# Altium PCB Schema_MaletteDevasion_PCB ASCII REV 1.00.PcbDoc
Units mm, origin at the board's own origin, x right, y up, seen from the top; angles counter-clockwise.
Board outline 390 x 250 mm, 2 copper layers (Top, Bottom), stack 1.54 mm thick; 86 components, 46 nets, 361 pads, 11 vias.
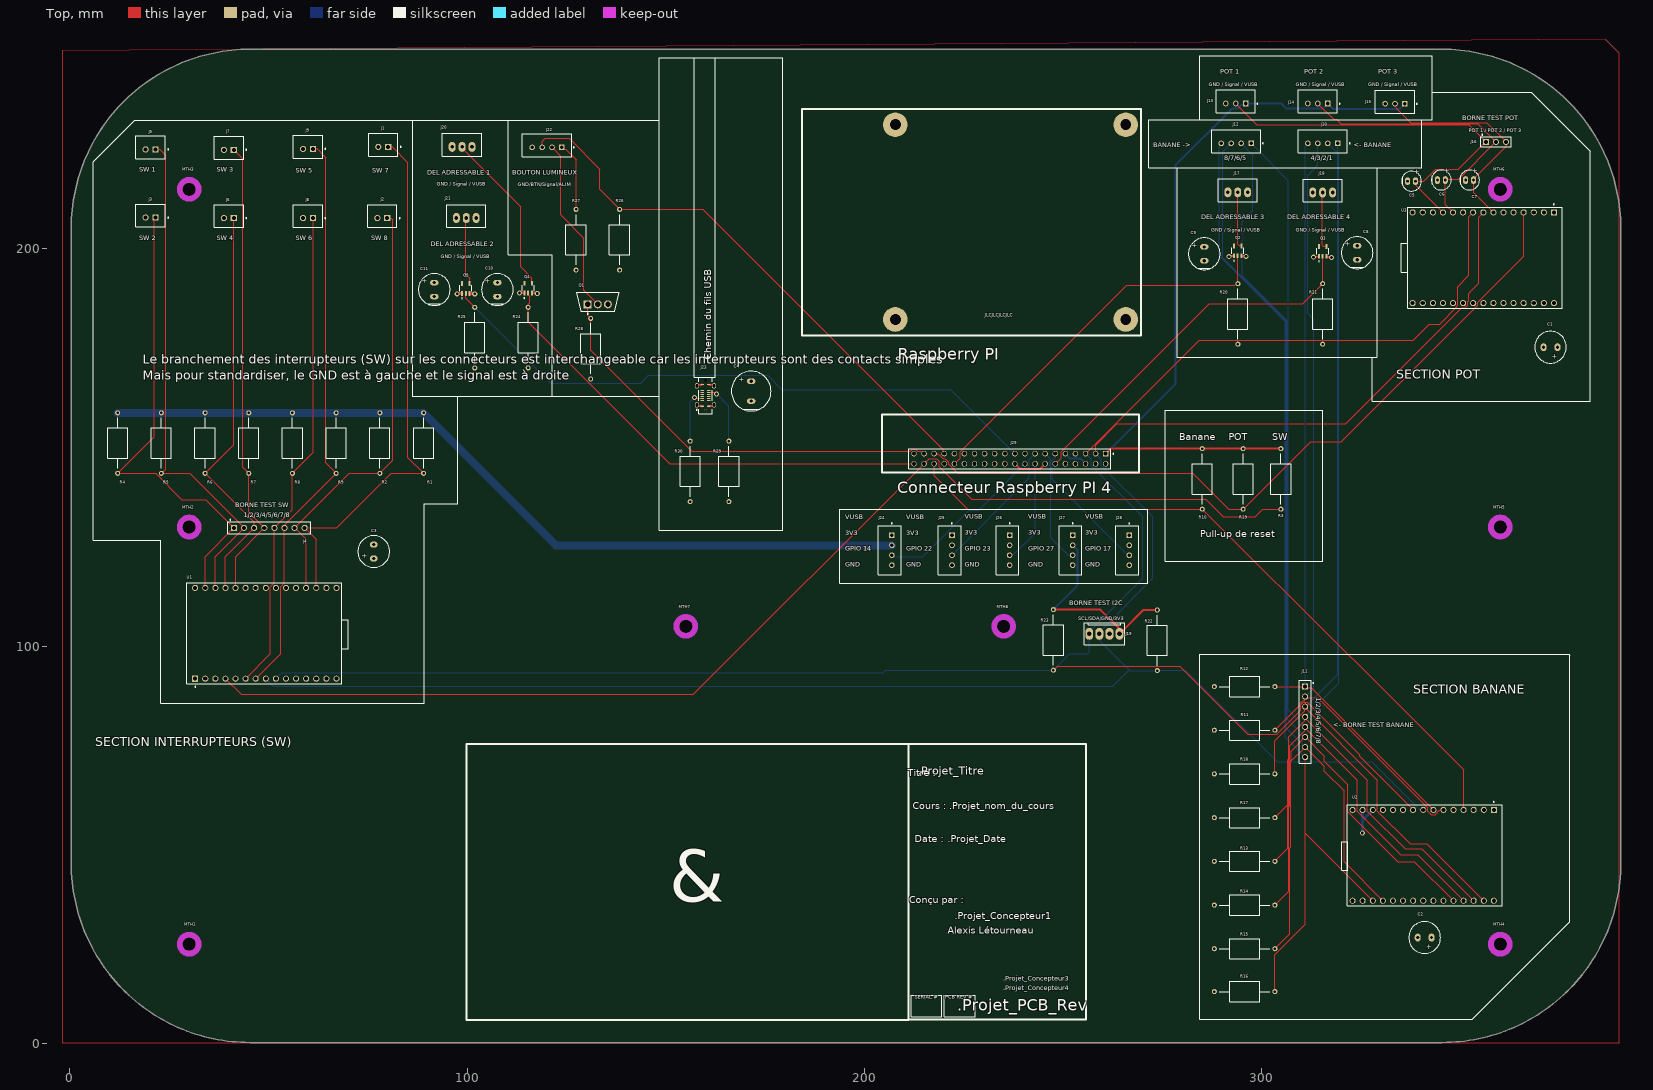
[diagram p0: Top view]
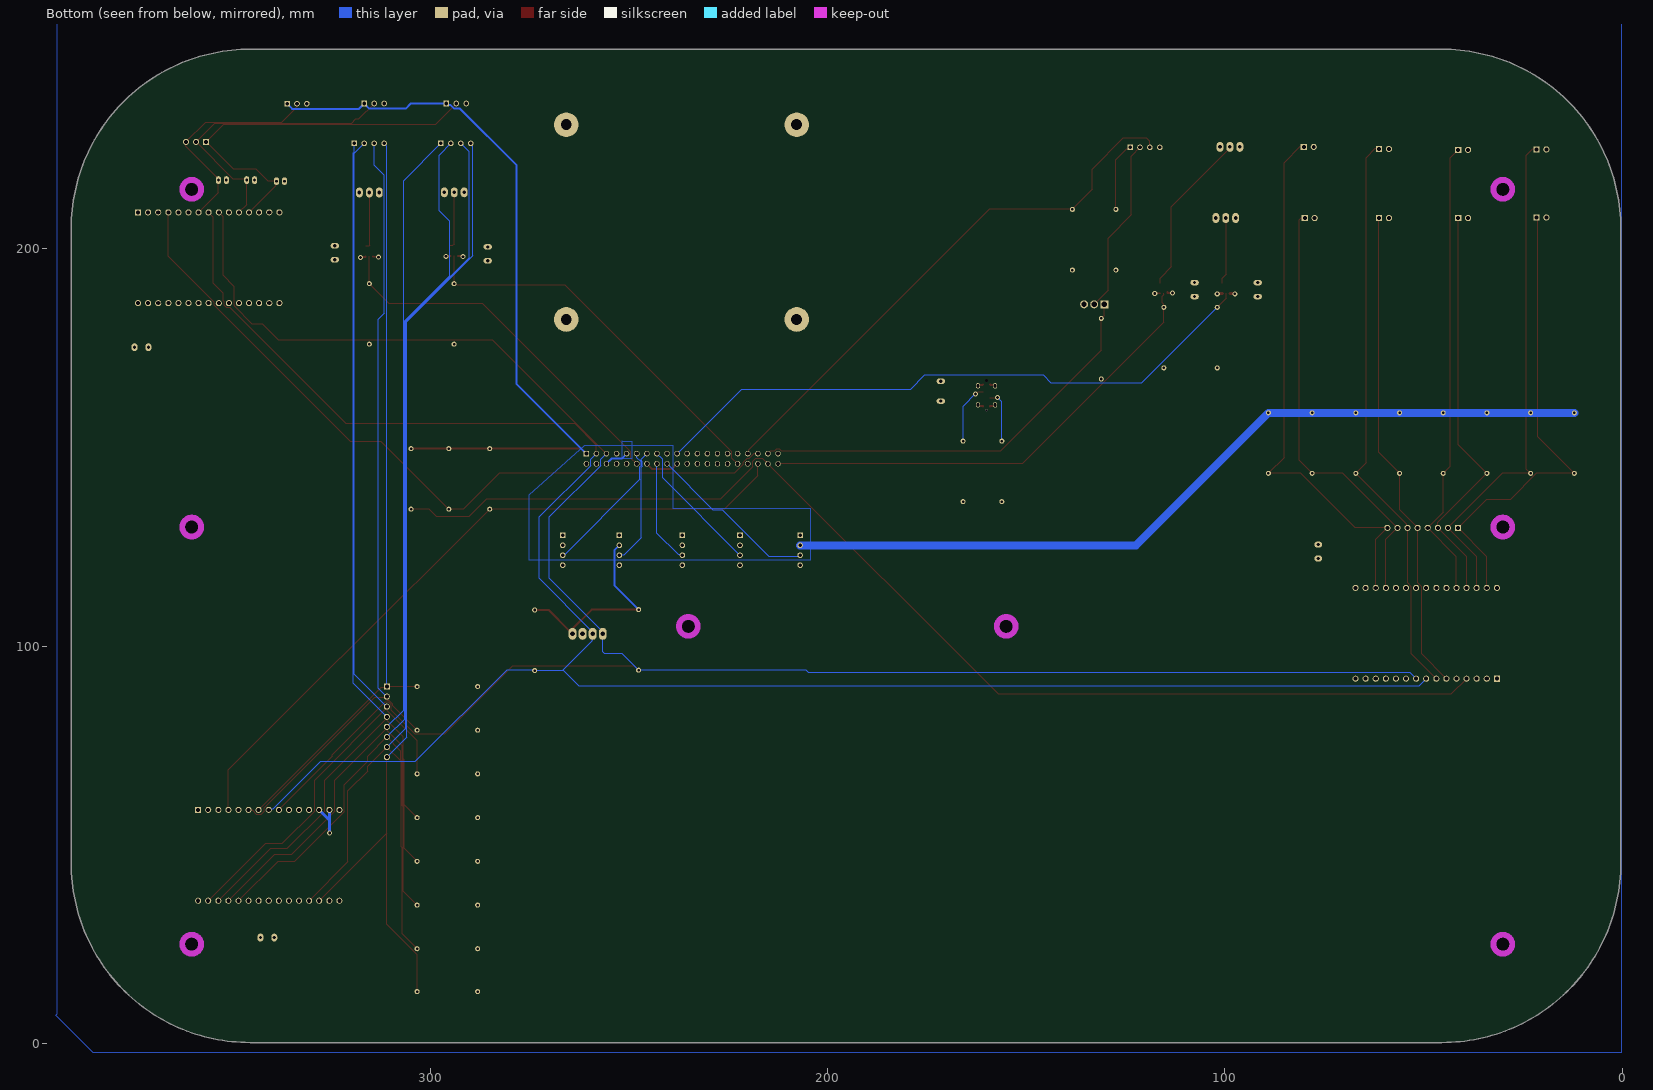
[diagram p1: Bottom view, seen from below]

## Layer stack, top to bottom
Top Solder: solder mask 0.0102, Solder Resist, Dk 3.5
Top: signal copper 0.035
Dielectric 1: core 1.47, FR-4, Dk 4.6
Bottom: signal copper 0.035
Bottom Solder: solder mask 0.0102, Solder Resist, Dk 3.5

## Board outline
0.318,45.254 0.318,205.254 cw(c45.318,205.254) 45.318,250.254 345.318,250.254 cw(c345.318,205.254) 390.318,205.254 390.318,45.254 cw(c345.318,45.254) 345.318,0.254 45.318,0.254 cw(c45.318,45.254)

## Design rules (kind name [scope] priority, off if disabled: settings)
AssemblyTestPointUsage [All] p0: scope1count=1 scope1_0_kind=Board scope1_0_value=Board scope2count=1 scope2_0_kind=Board scope2_0_value=Board commentlength=0
AssemblyTestpoint [All] p0: scope1count=1 scope1_0_kind=Board scope1_0_value=Board scope2count=1 scope2_0_kind=Board scope2_0_value=Board commentlength=0
BoardOutlineClearance [All] p0: scope1count=1 scope1_0_kind=Board scope1_0_value=Board scope2count=1 scope2_0_kind=Board scope2_0_value=Board commentlength=0 gap=0.2
BoardOutlineClearance [All] p1: gap=0.2 ignorepadtopadclearanceinfootprint=FALSE except(0: Arc-SplitContinuation Track-SplitContinuation SMDPad-SplitContinuation THPad-SplitContinuation Via-SplitContinuation Fill-SplitContinuation Poly-SplitContinuation Region-SplitContinuation Text-SplitContinuation)
Clearance [All] p0: scope1count=1 scope1_0_kind=Board scope1_0_value=Board scope2count=1 scope2_0_kind=Board scope2_0_value=Board commentlength=0 gap=0.152
Clearance [All] p1: gap=0.152 ignorepadtopadclearanceinfootprint=FALSE except(0: Arc-Hole Track-Hole SMDPad-Hole THPad-Hole Via-Hole Fill-Hole Poly-Hole Region-Hole Text-Hole; 0.127: Arc-Arc Arc-Track Track-Track SMDPad-Fill SMDPad-Poly SMDPad-Region; 0.2: Arc-SMDPad Track-SMDPad; 0.254: Arc-Via Track-Via Via-Via; 0.33: Arc-THPad Track-THPad; 0.5: THPad-THPad)
ComponentClearance [All] p0: scope1count=1 scope1_0_kind=Board scope1_0_value=Board scope2count=1 scope2_0_kind=Board scope2_0_value=Board commentlength=0 gap=0.102 collisioncheckmode=3
ComponentClearance [All] p1: gap=0.102 collisioncheckmode=3 verticalgap=0.102 showdistances=FALSE
DiffPairsRouting [All] p0: scope1count=1 scope1_0_kind=Board scope1_0_value=Board scope2count=1 scope2_0_kind=Board scope2_0_value=Board commentlength=0
FabricationTestPointUsage [All] p0: scope1count=1 scope1_0_kind=Board scope1_0_value=Board scope2count=1 scope2_0_kind=Board scope2_0_value=Board commentlength=0 valid=0 allowmultiple=FALSE
FabricationTestpoint [All] p0: scope1count=1 scope1_0_kind=Board scope1_0_value=Board scope2count=1 scope2_0_kind=Board scope2_0_value=Board commentlength=0 side=3 testpointundercomponent=TRUE minsize=1.016 maxsize=2.54 preferedsize=1.524 minholesize=0 maxholesize=1.016 preferedholesize=0.813 testpointgrid=0.025
FanoutControl Fanout_Default [All] p0: scope1count=1 scope1_0_kind=Board scope1_0_value=Board scope2count=1 scope2_0_kind=Board scope2_0_value=Board commentlength=30 // Fanout_Default (Default Rule)
FanoutControl Fanout_Small [All] p0 off: scope1count=1 scope1_0_kind=Board scope1_0_value=Board scope2count=1 scope2_0_kind=Board scope2_0_value=Board commentlength=84 // Protel DXP Scope 1 Expression Was: (CompPinCount < 5)   Fanout_Small (Default Rule)
FanoutControl Fanout_SOIC [All] p0 off: scope1count=1 scope1_0_kind=Board scope1_0_value=Board scope2count=1 scope2_0_kind=Board scope2_0_value=Board commentlength=71 // Protel DXP Scope 1 Expression Was: IsSOIC   Fanout_SOIC (Default Rule)
FanoutControl Fanout_LCC [All] p0 off: scope1count=1 scope1_0_kind=Board scope1_0_value=Board scope2count=1 scope2_0_kind=Board scope2_0_value=Board commentlength=69 // Protel DXP Scope 1 Expression Was: IsLCC   Fanout_LCC (Default Rule)
FanoutControl Fanout_BGA [All] p0 off: scope1count=1 scope1_0_kind=Board scope1_0_value=Board scope2count=1 scope2_0_kind=Board scope2_0_value=Board commentlength=69 // Protel DXP Scope 1 Expression Was: IsBGA   Fanout_BGA (Default Rule)
Height [All] p0: scope1count=1 scope1_0_kind=Board scope1_0_value=Board scope2count=1 scope2_0_kind=Board scope2_0_value=Board commentlength=0
HoleSize [All] p0: scope1count=1 scope1_0_kind=Board scope1_0_value=Board scope2count=1 scope2_0_kind=Board scope2_0_value=Board commentlength=0 absolutevalues=TRUE maxlimit=6.3 minlimit=0.3 maxpercent=80.000 minpercent=20.000
HoleSize [All] p1: absolutevalues=TRUE maxlimit=6.3 minlimit=0.3 maxpercent=80.000 minpercent=20.000
HoleToHoleClearance [All] p0: scope1count=1 scope1_0_kind=Board scope1_0_value=Board scope2count=1 scope2_0_kind=Board scope2_0_value=Board commentlength=0
HoleToHoleClearance [All] p1: gap=0.5 allowstackedmicrovias=FALSE
LayerPairs [All] p0: scope1count=1 scope1_0_kind=Board scope1_0_value=Board scope2count=1 scope2_0_kind=Board scope2_0_value=Board commentlength=0 enforce=TRUE
MinimumAnnularRing [All] p0: scope1count=1 scope1_0_kind=Board scope1_0_value=Board scope2count=1 scope2_0_kind=Board scope2_0_value=Board commentlength=0 minimumring=0.1
MinimumAnnularRing [All] p1: minimumring=0.1
MinimumSolderMaskSliver [All] p0: scope1count=1 scope1_0_kind=Board scope1_0_value=Board scope2count=1 scope2_0_kind=Board scope2_0_value=Board commentlength=0
MinimumSolderMaskSliver [All] p1: minsoldermaskwidth=0.1
NetAntennae [All] p0: scope1count=1 scope1_0_kind=Board scope1_0_value=Board scope2count=1 scope2_0_kind=Board scope2_0_value=Board commentlength=0
PasteMaskExpansion [All] p0: scope1count=1 scope1_0_kind=Board scope1_0_value=Board scope2count=1 scope2_0_kind=Board scope2_0_value=Board commentlength=0 expansion=0
PlaneClearance [All] p0: scope1count=1 scope1_0_kind=Board scope1_0_value=Board scope2count=1 scope2_0_kind=Board scope2_0_value=Board commentlength=0 clearance=0.152
PlaneClearance [All] p1: clearance=0.152
PlaneConnect [All] p0: scope1count=1 scope1_0_kind=Board scope1_0_value=Board scope2count=1 scope2_0_kind=Board scope2_0_value=Board commentlength=0 planeconnectstyle=Relief reliefexpansion=0.508 reliefentries=4 reliefconductorwidth=0.254 reliefairgap=0.254
PlaneConnect [All] p1: pad.planeconnectstyle=Relief pad.reliefexpansion=0.508 pad.reliefentries=4 pad.reliefconductorwidth=0.254 pad.reliefairgap=0.254 via.planeconnectstyle=Direct via.reliefexpansion=0.508 via.reliefentries=4 via.reliefconductorwidth=0.254 via.reliefairgap=0.254
PolygonConnect [All] p0: scope1count=1 scope1_0_kind=Board scope1_0_value=Board scope2count=1 scope2_0_kind=Board scope2_0_value=Board commentlength=0 connectstyle=Relief reliefconductorwidth=0.254 reliefentries=4 polygonreliefangle="90 Angle"
PolygonConnect [All] p1: thpad.connectstyle=Relief thpad.reliefconductorwidth=0.254 thpad.reliefentries=4 thpad.polygonreliefangle="90 Angle" thpad.airgapwidth=0.254 smdpad.connectstyle=Relief smdpad.reliefconductorwidth=0.254 smdpad.reliefentries=4 smdpad.polygonreliefangle="90 Angle" smdpad.airgapwidth=0.254 via.connectstyle=Direct via.reliefconductorwidth=0.254 via.reliefentries=4 via.polygonreliefangle="90 Angle" via.airgapwidth=0.254
RoutingCorners [All] p0: scope1count=1 scope1_0_kind=Board scope1_0_value=Board scope2count=1 scope2_0_kind=Board scope2_0_value=Board commentlength=0 cornerstyle=45-Degree minsetback=2.54 maxsetback=2.54
RoutingLayers [All] p0: scope1count=1 scope1_0_kind=Board scope1_0_value=Board scope2count=1 scope2_0_kind=Board scope2_0_value=Board commentlength=0 top layer=Automatic bottom layer=Automatic
RoutingPriority [All] p0: scope1count=1 scope1_0_kind=Board scope1_0_value=Board scope2count=1 scope2_0_kind=Board scope2_0_value=Board commentlength=0
RoutingTopology [All] p0: scope1count=1 scope1_0_kind=Board scope1_0_value=Board scope2count=1 scope2_0_kind=Board scope2_0_value=Board commentlength=0 topology=Shortest
RoutingVias [All] p0: scope1count=1 scope1_0_kind=Board scope1_0_value=Board scope2count=1 scope2_0_kind=Board scope2_0_value=Board commentlength=0 holewidth=0.3 width=0.5 viastyle="Through Hole" minholewidth=0.3 minwidth=0.5 maxholewidth=6.3 maxwidth=6.5
RoutingVias [All] p1: holewidth=0.3 width=0.5 viastyle="Through Hole" minholewidth=0.3 minwidth=0.5 maxholewidth=6.3 maxwidth=6.5
ShortCircuit [All] p0: scope1count=1 scope1_0_kind=Board scope1_0_value=Board scope2count=1 scope2_0_kind=Board scope2_0_value=Board commentlength=0 allowed=FALSE
SilkToBoardRegionClearance [All] p0: scope1count=1 scope1_0_kind=Board scope1_0_value=Board scope2count=1 scope2_0_kind=Board scope2_0_value=Board commentlength=0
SilkToSilkClearance [All] p0: scope1count=1 scope1_0_kind=Board scope1_0_value=Board scope2count=1 scope2_0_kind=Board scope2_0_value=Board commentlength=0
SilkToSilkClearance [All] p1: silktosilkclearance=0.102
SilkToSolderMaskClearance [All] p0 off: scope1count=1 scope1_0_kind=Board scope1_0_value=Board scope2count=1 scope2_0_kind=Board scope2_0_value=Board commentlength=44 // Protel DXP Scope 1 Expression Was: IsPad
SilkToSolderMaskClearance [IsPad] p1: minsilkscreentomaskgap=0.024 clearancetoexposedcopper=FALSE
SolderMaskExpansion [All] p0: scope1count=1 scope1_0_kind=Board scope1_0_value=Board scope2count=1 scope2_0_kind=Board scope2_0_value=Board commentlength=0 expansion=0.051
SolderMaskExpansion SolderMaskExpansion_Via [All] p0 off: scope1count=1 scope1_0_kind=Board scope1_0_value=Board scope2count=1 scope2_0_kind=Board scope2_0_value=Board commentlength=44 expansion=0.102 // Protel DXP Scope 1 Expression Was: isVia
SolderMaskExpansion SolderMaskExpansion_Via [isVia] p1: expansion=0.102 istentingtop=TRUE
SolderMaskExpansion [All] p2: expansion=0.051 istentingtop=FALSE
UnRoutedNet [All] p0: scope1count=1 scope1_0_kind=Board scope1_0_value=Board scope2count=1 scope2_0_kind=Board scope2_0_value=Board commentlength=0
UnpouredPolygon [All] p0: scope1count=1 scope1_0_kind=Board scope1_0_value=Board scope2count=1 scope2_0_kind=Board scope2_0_value=Board commentlength=0
Width [All] p0: scope1count=1 scope1_0_kind=Board scope1_0_value=Board scope2count=1 scope2_0_kind=Board scope2_0_value=Board commentlength=0 maxlimit=25.4 minlimit=0.127 preferedwidth=0.152
Width [All] p1: maxlimit=25.4 minlimit=0.127 preferedwidth=0.152 minimp=50.000000 maximp=50.000000 favimp=50.000000
22 further rules are at their usual default settings.

## Classes and differential pairs
component class Alimentation_USB_Header: C4 J23 R29 R30
component class Énigme3_Potentiomètres: C3 C5 C6 C7 J13 J14 J15 J16 R19 U3
component class Énigme2_Crocodile: C2 J10 J11 J12 R10 R11 R12 R13 R14 R15 R16 R17 R18 U2
component class Énigme1_Switch: C1 J1 J2 J3 J4 J5 J6 J7 J8 J9 R1 R2 R3 R4 R5 R6 R7 R8 R9 U1
component class Raspberry_Pi_4_ModelB: C8 C9 C10 C11 J17 J18 J19 J20 J21 J22 J24 J25 J26 J27 J28 J29 ll MTH1 MTH2 MTH3 MTH4 MTH5 MTH6 MTH7 MTH8 Q1 Q2 Q3 Q4 Q5 R20 R21 R22 R23 R24 R25 R26 R27 R28

## Components (designator, comment, footprint, x,y, rotation, side; value= is the part's Value field where it differs from the comment)
C1 "100 µF" "CAP AL TH D8 L3.5 H12.5" 372.646,175.26 r180 top
C2 "100 µF" "CAP AL TH D8 L3.5 H12.5" 340.967,26.67 r180 top
C3 "100 µF" "CAP AL TH D8 L3.5 H12.5" 76.454,123.825 r90 top
C4 "470 µF" "CAP TH ALPOLY D10.00mm S5.00mm H13.00mm" 171.45,164.211 r90 top
C5 "0.1µF" "CAP TH ALUM ELEC D5.00mm S2.00mm H12.00mm" 337.664,217.058 r0 top
C6 "0.1µF" "CAP TH ALUM ELEC D5.00mm S2.00mm H12.00mm" 345.17,217.33 r0 top
C7 "0.1µF" "CAP TH ALUM ELEC D5.00mm S2.00mm H12.00mm" 352.282,217.33 r0 top
C8 "0.1 uf" "CAP TH ALPOLY D8.00mm S3.50mm H21.50mm" 323.977,199.035 r90 top
C9 "0.1 uf" "CAP TH ALPOLY D8.00mm S3.50mm H21.50mm" 285.496,198.767 r90 top
C10 "0.1 uf" "CAP TH ALPOLY D8.00mm S3.50mm H21.50mm" 107.569,189.766 r90 top
C11 "0.1 uf" "CAP TH ALPOLY D8.00mm S3.50mm H21.50mm" 91.694,189.766 r90 top
J1 "B2B-XH-A(LF)(SN)" FP-B2B-XH-A_LF_SN-MFG 78.837,226.193 r180 top
J2 "B2B-XH-A(LF)(SN)" FP-B2B-XH-A_LF_SN-MFG 78.593,208.291 r180 top
J3 "B2B-XH-A(LF)(SN)" FP-B2B-XH-A_LF_SN-MFG 20.3,208.424 r180 top
J4 "CON_HDR_1X8" CON_HDR_1x8 50.165,129.794 r90 top
J5 "B2B-XH-A(LF)(SN)" FP-B2B-XH-A_LF_SN-MFG 20.3,225.569 r180 top
J6 "B2B-XH-A(LF)(SN)" FP-B2B-XH-A_LF_SN-MFG 39.985,208.291 r180 top
J7 "B2B-XH-A(LF)(SN)" FP-B2B-XH-A_LF_SN-MFG 39.985,225.461 r180 top
J8 "B2B-XH-A(LF)(SN)" FP-B2B-XH-A_LF_SN-MFG 59.924,208.291 r180 top
J9 "B2B-XH-A(LF)(SN)" FP-B2B-XH-A_LF_SN-MFG 59.924,225.679 r180 top
J10 "B4B-XH-A(LF)(SN)" FP-B4B-XH-A_LF_SN-MFG 315.321,227.093 r0 top
J11 "CON_HDR_1X8" CON_HDR_1x8 310.896,80.967 r0 top
J12 "B4B-XH-A(LF)(SN)" FP-B4B-XH-A_LF_SN-MFG 293.517,227.093 r0 top
J13 "B3B-XH-A(LF)(SN)" FP-B3B-XH-A_LF_SN-MFG 293.41,237.126 r180 top
J14 "B3B-XH-A(LF)(SN)" FP-B3B-XH-A_LF_SN-MFG 314.071,237.126 r180 top
J15 "B3B-XH-A(LF)(SN)" FP-B3B-XH-A_LF_SN-MFG 333.502,237.076 r180 top
J16 "CON_HDR_1X3" CON_HDR_1x3 358.902,226.949 r90 top
J17 "B3B-XH-A(LF)(SN)" "JST XH B3B-XH-A" 293.918,214.249 r180 top
J18 "B3B-XH-A(LF)(SN)" "JST XH B3B-XH-A" 315.301,214.208 r180 top
J19 "0022272041" "MOLEX KK 0022272041" 260.35,103.124 r180 top
J20 "B3B-XH-A(LF)(SN)" "JST XH B3B-XH-A" 98.679,225.693 r180 top
J21 "B3B-XH-A(LF)(SN)" "JST XH B3B-XH-A" 99.735,207.791 r180 top
J22 "B4B-XH-A(LF)(SN)" FP-B4B-XH-A_LF_SN-MFG 120.075,226.077 r0 top
J23 "USB4120-03-C" FP-USB4120-03-C-MFG 159.95,163.135 r90 top
J24 "B4B-XH-A(LF)(SN)" FP-B4B-XH-A_LF_SN-MFG 206.358,124.146 r90 top
J25 "B4B-XH-A(LF)(SN)" FP-B4B-XH-A_LF_SN-MFG 221.471,124.146 r90 top
J26 "B4B-XH-A(LF)(SN)" FP-B4B-XH-A_LF_SN-MFG 235.966,124.146 r90 top
J27 "B4B-XH-A(LF)(SN)" FP-B4B-XH-A_LF_SN-MFG 251.824,124.146 r90 top
J28 "B4B-XH-A(LF)(SN)" FP-B4B-XH-A_LF_SN-MFG 266.096,124.146 r90 top
J29 "TSW-120-25-G-D" SAMTEC_TSW-120-25-G-D 260.687,148.463 r180 top
MTH1 "MTH_M3_NON_PLATED" MTH_M3_NON_PLATED 30,25 r0 top
MTH2 "MTH_M3_NON_PLATED" MTH_M3_NON_PLATED 30,130 r0 top
MTH3 "MTH_M3_NON_PLATED" MTH_M3_NON_PLATED 30,215 r0 top
MTH4 "MTH_M3_NON_PLATED" MTH_M3_NON_PLATED 360,25 r0 top
MTH5 "MTH_M3_NON_PLATED" MTH_M3_NON_PLATED 360,130 r0 top
MTH6 "MTH_M3_NON_PLATED" MTH_M3_NON_PLATED 360,215 r0 top
MTH7 "MTH_M3_NON_PLATED" MTH_M3_NON_PLATED 155,105 r0 top
MTH8 "MTH_M3_NON_PLATED" MTH_M3_NON_PLATED 235,105 r0 top
Q1 "IRF520NPBF" FP-PG-TO220-3-MFG 132.842,186.665 r90 top
Q2 "74HC1G125GV-Q100H" SOT95P275X110-5N 293.918,199.517 r90 top
Q3 "74HC1G125GV-Q100H" SOT95P275X110-5N 315.301,199.39 r90 top
Q4 "74HC1G125GV-Q100H" SOT95P275X110-5N 115.31,190.116 r90 top
Q5 "74HC1G125GV-Q100H" SOT95P275X110-5N 99.614,190.061 r90 top
R1 "10 Kohm" Res_Template 89,143.51 r90 top
R2 "10 Kohm" Res_Template 78,143.51 r90 top
R3 "10 Kohm" Res_Template 304.8,134.493 r90 top
R4 "10 Kohm" Res_Template 12,143.51 r90 top
R5 "10 Kohm" Res_Template 23,143.51 r90 top
R6 "10 Kohm" Res_Template 34,143.51 r90 top
R7 "10 Kohm" Res_Template 45,143.51 r90 top
R8 "10 Kohm" Res_Template 56,143.51 r90 top
R9 "10 Kohm" Res_Template 67,143.51 r90 top
R10 "10 Kohm" Res_Template 284.988,134.493 r90 top
R11 "10 Kohm" Res_Template 288.036,78.857 r0 top
R12 "10 Kohm" Res_Template 288.036,89.857 r0 top
R13 "10 Kohm" Res_Template 288.036,45.857 r0 top
R14 "10 Kohm" Res_Template 288.036,34.857 r0 top
R15 "10 Kohm" Res_Template 288.036,23.857 r0 top
R16 "10 Kohm" Res_Template 288.036,13.081 r0 top
R17 "10 Kohm" Res_Template 288.036,56.857 r0 top
R18 "10 Kohm" Res_Template 288.036,67.857 r0 top
R19 "10 Kohm" Res_Template 295.275,134.493 r90 top
R20 "10 Kohm" Res_Template 293.959,176.022 r90 top
R21 "10 Kohm" Res_Template 315.301,176.022 r90 top
R22 "4.7 Kohm" Res_Template 273.685,93.876 r90 top
R23 "4.7 Kohm" Res_Template 247.523,109.22 r270 top
R24 "10 Kohm" Res_Template 115.31,170.053 r90 top
R25 "10 Kohm" Res_Template 101.876,170.053 r90 top
R26 "4.7 Kohm" Res_Template 138.317,209.931 r270 top
R27 "90 ohm" Res_Template 127.367,209.931 r270 top
R28 "4.7 Kohm" Res_Template 131.064,167.259 r90 top
R29 "5.1 Kohm" Res_Template 165.862,136.398 r90 top
R30 "5.1 Kohm" Res_Template 156.083,136.398 r90 top
U1 "ESP32-C3-DEVKITC-02" XCVR_ESP32-C3-DEVKITC-02 48.895,103.251 r90 top
U2 "ESP32-C3-DEVKITC-02" XCVR_ESP32-C3-DEVKITC-02 340.995,47.371 r270 top
U3 "ESP32-C3-DEVKITC-02" XCVR_ESP32-C3-DEVKITC-02 356.115,197.773 r270 top

## Footprints (in the part's own frame and the unit in brackets; to place one, negate y for a bottom-side part, rotate by r counter-clockwise, add the part's x,y. Pads: shape width x height; smd on the part's side, far side on the other; paste and mask are expansions set on the pad)
"CAP AL TH D8 L3.5 H12.5" [mm] "8MM Diameter, 3.5MM Lead Spacing Aluminium Capacitor"
  oval 1.5x2 hole 0.8: 1(-1.75,0) 2(1.75,0)
  silkscreen extent -4,-4 4,4
"CAP TH ALPOLY D8.00mm S3.50mm H21.50mm" [mm] "8.00mm Diameter 21.50mm Lead Spacing Aluminum - Polymer Capacitors Radial, Can"
  oval 1.4x2.1 hole 0.8: 1(1.75,0) 2(-1.75,0)
  silkscreen extent -4,-4 4,4
"CAP TH ALPOLY D10.00mm S5.00mm H13.00mm" [mm] "10.00mm Diameter 13.00mm Lead Spacing Aluminum - Polymer Capacitors Radial, Can"
  oval 1.4x2.1 hole 0.8: 1(2.5,0) 2(-2.5,0)
  silkscreen extent -5,-5 5,5
"CAP TH ALUM ELEC D5.00mm S2.00mm H12.00mm" [mm] "5mm Diameter 2mm Lead Spacing Aluminum Electrolytic Capacitors Radial, Can"
  oval 1.3x1.95 hole 0.7: 1(1,0) 2(-1,0)
  silkscreen extent -2.5,-2.5 2.5,2.5
CON_HDR_1x3 [mil]
  rect 60x60 hole 40: 1(0,100)
  round 60 hole 40: 2(0,0) 3(0,-100)
  silkscreen extent -50,-150 75,150
CON_HDR_1x8 [mil]
  rect 60x60 hole 40 mask+0: 1(0,350)
  round 60 hole 40 mask+0: 2(0,250) 3(0,150) 4(0,50) 5(0,-50) 6(0,-150) 7(0,-250) 8(0,-350)
  silkscreen extent -60,-410 85,410
FP-B2B-XH-A_LF_SN-MFG [mm]
  rect 1.55x1.55 hole 1 paste+0 mask+0: 1(-1.25,0.525)
  round 1.55 hole 1 paste+0 mask+0: 2(1.25,0.525)
  silkscreen extent -4.5,-2.88 3.7,2.88
FP-B3B-XH-A_LF_SN-MFG [mm]
  rect 1.4x1.4 hole 0.9 paste+0 mask+0: 1(-2.5,0.525)
  round 1.4 hole 0.9 paste+0 mask+0: 2(0,0.525) 3(2.5,0.525)
  silkscreen extent -5.6,-2.88 4.95,2.88
FP-B4B-XH-A_LF_SN-MFG [mm]
  rect 1.4x1.4 hole 0.9 paste+0 mask+0: 1(3.75,-0.525)
  round 1.4 hole 0.9 paste+0 mask+0: 2(1.25,-0.525) 3(-1.25,-0.525) 4(-3.75,-0.525)
  silkscreen extent -6.2,-2.88 6.88,2.88
FP-PG-TO220-3-MFG [mm]
  rect 2x2 hole 1.3 paste+0 mask+0: 1(-0.61,2.54)
  round 2 hole 1.3 paste+0 mask+0: 2(-0.61,0) 3(-0.61,-2.54)
  silkscreen extent -3.1,-5.38 2.41,5.38
FP-USB4120-03-C-MFG [mm]
  rrect100% 1.35x1.1 hole 0.6 slot 0.85 at 0 deg paste+0 mask+0: 1(-2.4,2.15) 2(2.4,2.15) 3(-2.4,-2.15) 4(2.4,-2.15)
  rect 0.3x0.87 smd paste+0 mask+0: A1(-2.75,0.865) A4(-1.25,0.865) A5(-0.75,0.865) A6(-0.25,0.865) A7(0.25,0.865) A8(0.75,0.865) A9(1.25,0.865) A12(2.75,0.865) B1(2.75,-0.865) B4(1.25,-0.865) B5(0.75,-0.865) B6(0.25,-0.865) B7(-0.25,-0.865) B8(-0.75,-0.865) B9(-1.25,-0.865) B12(-2.75,-0.865)
  round 0.52 hole 0.52 unplated paste+0 mask+0: ""(-3.75,0)
  rrect100% 0.72x0.52 hole 0.52 slot 0.72 at 0 deg unplated paste+0 mask+0: ""(3.75,0)
  silkscreen extent -4.59,-1.71 4.59,2.3
"JST XH B3B-XH-A" [mm]
  oval 1.75x2.5 hole 0.9: 1(-2.5,0) 2(0,0) 3(2.5,0)
  silkscreen extent -4.95,-3.38 4.95,2.38
"MOLEX KK 0022272041" [mm]
  oval 2x3 hole 1.2: 1(-3.81,0) 2(-1.27,0) 3(1.27,0) 4(3.81,0)
  silkscreen extent -5.08,-2.79 5.08,2.79
MTH_M3_NON_PLATED [mm] "Mounting Hole Metric M3 NON_PLATED"
  round 0 hole 3.3 unplated paste+0 mask+0: 1(0,0)
  Top keep-out circle w1.45: c0,0 r2.375
  Bottom keep-out circle w1.45: c0,0 r2.375
Res_Template [mm]
  round 1.27 hole 0.635: 1(0,0) 2(15.24,0)
  silkscreen extent 1.27,-2.54 13.97,2.54
SAMTEC_TSW-120-25-G-D [mm]
  rect 1.37x1.37 hole 1.02: 01(0,0)
  round 1.37 hole 1.02: 02(0,2.54) 03(2.54,0) 04(2.54,2.54) 05(5.08,0) 06(5.08,2.54) 07(7.62,0) 08(7.62,2.54) 09(10.16,0) 10(10.16,2.54) 11(12.7,0) 12(12.7,2.54) 13(15.24,0) 14(15.24,2.54) 15(17.78,0) 16(17.78,2.54) 17(20.32,0) 18(20.32,2.54) 19(22.86,0) 20(22.86,2.54) 21(25.4,0) 22(25.4,2.54) 23(27.94,0) 24(27.94,2.54) 25(30.48,0) 26(30.48,2.54) 27(33.02,0) 28(33.02,2.54) 29(35.56,0) 30(35.56,2.54) 31(38.1,0) 32(38.1,2.54) 33(40.64,0) 34(40.64,2.54) 35(43.18,0) 36(43.18,2.54) 37(45.72,0) 38(45.72,2.54) 39(48.26,0) 40(48.26,2.54)
  silkscreen extent -2.02,-1.27 49.53,3.81
SOT95P275X110-5N [mm]
  rrect25% 1.22x0.5 smd: 1(-1.245,0.95) 2(-1.245,0) 3(-1.245,-0.95) 4(1.245,-0.95) 5(1.245,0.95)
  silkscreen extent -2.6,-1.52 0.75,1.52
XCVR_ESP32-C3-DEVKITC-02 [mm]
  rect 1.53x1.53 hole 1.02: 1(-11.43,17.392)
  round 1.53 hole 1.02: 2(-11.43,14.852) 3(-11.43,12.312) 4(-11.43,9.772) 5(-11.43,7.232) 6(-11.43,4.692) 7(-11.43,2.152) 8(-11.43,-0.388) 9(-11.43,-2.928) 10(-11.43,-5.468) 11(-11.43,-8.008) 12(-11.43,-10.548) 13(-11.43,-13.088) 14(-11.43,-15.628) 15(-11.43,-18.168) 16(11.43,-18.168) 17(11.43,-15.628) 18(11.43,-13.088) 19(11.43,-10.548) 20(11.43,-8.008) 21(11.43,-5.468) 22(11.43,-2.928) 23(11.43,-0.388) 24(11.43,2.152) 25(11.43,4.692) 26(11.43,7.232) 27(11.43,9.772) 28(11.43,12.312) 29(11.43,14.852) 30(11.43,17.392)
  silkscreen extent -13.56,-19.46 12.7,19.46

## Part data
C1 C2 C3: library part 860020674015, "CAP ALUM 100UF 20% 50V RADIAL"
C4: library part A759MS477M1EAAE020, "CAP ALUM POLY 470UF 20% 25V T/H"
C5 C6 C7: library part UKL2A0R1KDD, "CAP ALUM 0.1UF 10% 100V RADIAL"
C8 C9 C10 C11: library part APSG160ELL152MH20S, "ALUMINUM CAPACITOR"
J1 J2 J3 J5 J6 J7 J8 J9: library part CMP-2000-05888-3, "CONN HEADER VERT 2POS 2.5MM"
J4 J11: library part CMP-005-000004-1, "CON - Header 1X8 pins, 100Mils - TH-8"
J10 J12 J22 J24 J25 J26 J27 J28: library part CMP-17439-000250-1, "CONN HEADER VERT 4POS 2.5MM"
J13 J14 J15: library part CMP-17439-000014-3, "CONN HEADER VERT 3POS 2.5MM"
J16: library part CMP-005-000001-1, "CON - Header 1x3 pins-100Mils - TH"
J17 J18 J20 J21: "CONN HEADER VERT 3POS 2.5MM"
J19: "CONN HEADER VERT 4POS 2.54MM"
J23: library part CMP-03329-113696351-1, "USB4120-03-C 16 Position 48 VDC USB Type C Vertical USB 2.0 Receptacle Connector"
MTH1 MTH2 MTH3 MTH4 MTH5 MTH6 MTH7 MTH8: library part CMP-006-000010-2, "MTH - MOUNTING HOLE M3 NON-PLATED - M3"
Q1: library part CMP-32901-000276-1, "MOSFET N-CH 100V 9.7A TO-220AB"
Q2 Q3 Q4 Q5: library part "74HC1G125GV-Q100H NXP Semiconductors", "Bus Driver, HC/UH Series, 1-Func, 1-Bit, True Output, CMOS, PDSO5"
R1 R2 R3 R4 R5 R6 R7 R8 R9 R10 R11 R12 R13 R14 R15 R16 R17 R18 R19 R20 R21 R22 R23 R24 R25 R26 R27 R28 R29 R30: library part "470 ohm", "Custom Semiconductor Resistor"
U1 U2 U3: "Development Boards & Kits - Wireless (Engineering Samples) ESP32-C3 General-Purpose Development Board, embeds ESP32-C3-WROOM-02, 4 MB Flash, with Pin Header"

## Free pads (board coordinates)
  round 6.2 hole 2.75: 2(207.728,182.245) 2(207.728,231.267) 2(265.728,182.245) 2(265.728,231.267)

## Via types
v1: diameter 1.27, hole 0.711, Top to Bottom, tented both sides, 11 vias

## Nets (pads, with @x,y where several pads share a name; then routed paths per layer and width w, separated by ;. In a path a pad name is that pad's centre, name@x,y a point inside that pad or via, vN(x,y) a via of type N, cw(c..) or ccw(c..) an arc to the next point about the centre after c; other vN are vias at no path point)
3V3: J13.1 J14.1 J15.1 J19.1 J24.2 J25.2 J26.2 J27.2 J28.2 J29.01 J29.17 R1.2 R2.2 R3.2 R4.2 R5.2 R6.2 R7.2 R8.2 R9.2 R10.2 R19.2 R22.2 R23.1 | length 449.5
  Top w0.5: R23.1 259.319,109.22 J19.1@264.16,104.379 ; J29.01 261.957,149.733 R10.2 R19.2 R3.2 ; J19.1 264.16,103.218 264.853,103.911 264.947,103.911 270.152,109.116 R22.2
  Bottom w0.5: R23.1 253.629,115.326 253.629,124.116 J27.2 ; J29.01 278.291,166.067 278.291,221.141 292.471,235.321 293.94,235.321 294.835,236.216 295.525,236.216 J13.1 304.841,236.601 306.121,235.321 315.291,235.321 J14.1 317.901,235.271 334.722,235.271 J15.1
  Bottom w2: R4.2 R5.2 R6.2 R7.2 R8.2 R9.2 R2.2 R1.2 122.354,125.396 J24.2
GND: C1.2 C2.2 C3.2 C4.2 C5.2 C6.2 C7.2 C8.2 C9.2 C10.2 C11.2 J1.2 J2.2 J3.2 J5.2 J6.2 J7.2 J8.2 J9.2 J13.3 J14.3 J15.3 J17.3 J18.3 J19.2 J20.3 J21.3 J22.4 J23.1 J23.2 J23.3 J23.4 J23.A1 J23.A12 J23.B1 J23.B12 J24.4 J25.4 J26.4 J27.4 J28.4 J29.06 J29.09 J29.14 J29.20 J29.25 J29.30 J29.34 J29.39 Q1.3 Q2.1 Q2.3 Q3.1 Q3.3 Q4.1 Q4.3 Q5.1 Q5.3 R11.1 R12.1 R13.1 R14.1 R15.1 R16.1 R17.1 R18.1 R20.1 R21.1 R24.1 R25.1 R28.1 R29.1 R30.1 U1.1 U1.5 U1.10 U1.15 U1.16 U1.17 U1.20 U1.23 U1.25 U1.30 U2.1 U2.5 U2.10 U2.15 U2.16 U2.17 U2.20 U2.23 U2.25 U2.30 U3.1 U3.5 U3.10 U3.15 U3.16 U3.17 U3.20 U3.23 U3.25 U3.30 | length 32
  Top w0.5: U1.15 U1.15@67.155,91.729 ; R25.1@101.876,169.845 R25.1 ; v1(113.157,188.871) Q4.1 Q4.1@114.36,189.209 ; Q4.3@116.26,188.843 117.575,188.843 v1(117.602,188.816) ; J23.1 157.837,160.735 158.087,160.485 158.985,160.485 J23.A1 ; J23.2 158.04,165.775 158.89,165.775 159,165.885 J23.A12 ; J23.B12 160.915,160.485 161.813,160.485 162.063,160.735 J23.3 ; J23.B1 160.915,165.785 161.813,165.785 162.063,165.535 J23.4 ; J29.20 239.097,144.653 244.177,144.653 J29.14 ; v1(291.719,198.047) 291.831,198.159 292.968,198.159 Q2.1 ; Q2.3 294.868,198.209 295.974,198.209 v1(296.037,198.145) ; v1(313.003,197.912) 313.12,198.028 314.351,198.028 Q3.1 ; Q3.3 316.251,198.005 317.361,198.005 v1(317.5,197.866)
  Top w0.75: v1(97.455,188.706) 97.51,188.761 98.609,188.761 Q5.1 ; Q5.3 100.619,188.761 101.821,188.761 v1(101.876,188.706)
  Bottom w0.5: J29.09 251.797,147.193 254.337,147.193 J29.06
NetJ17_2: J17.2 Q2.4 | length 14.2
  Top w0.15: J17.2 293.959,214.208 293.959,201.196 294.393,200.762 Q2.4
NetJ18_2: J18.2 Q3.4 | length 14.5
  Top w0.15: J18.2 315.148,214.055 315.148,200.959 315.472,200.635 Q3.4
NetJ20_2: J20.2 Q4.4 | length 41.6
  Top w0.15: J20.2 98.679,225.318 113.44,210.557 113.44,195.477 116.26,192.657 116.26,191.846 116.26,191.661 Q4.4
NetJ21_2: J21.2 Q5.4 | length 17
  Top w0.15: J21.2 99.558,207.614 99.558,193.594 100.564,192.588 Q5.4
NetJ22_1: J22.1 R27.1 | length 17.4
  Top w0.25: J22.1 124.283,225.094 124.754,225.094 127.367,222.481 R27.1
NetJ22_2: J22.2 Q1.2 | length 44.3
  Top w0.15: J22.2 123.498,223.379 123.498,208.547 129.311,202.733 129.311,189.619 132.842,186.088 Q1.2
NetJ23_A5: J23.A5 R30.2 | length 13.5
  Top w0.25: v1(157.15,162.635) 157.426,162.635 157.676,162.385 J23.A5
  Bottom w0.152: R30.2 156.083,161.568 v1(157.15,162.635)
NetJ23_B5: J23.B5 R29.2 | length 15.3
  Top w0.25: J23.B5 162.107,163.885 162.474,163.518 v1(162.75,163.518)
  Bottom w0.152: v1(162.75,163.518) 162.8,163.518 165.862,160.456 R29.2
PIN_CROCO_0: J10.2 J11.3 R18.2 U2.29 | length 236.2
  Top w0.15: R18.2 303.276,76.267 310.799,83.79 310.799,84.68 J11.3 310.896,84.455 329.077,66.274 329.077,58.516 337.302,50.292 341.496,50.292 U2.29
  Bottom w0.15: J11.3 319.081,92.962 319.081,224.058 J10.2
PIN_CROCO_1: J10.1 J11.4 R17.2 U2.28 | length 242.8
  Top w0.15: R17.2 306.469,60.05 306.469,71.365 306.785,71.681 306.785,77.236 310.799,81.25 310.799,82.14 J11.4 310.896,81.915 326.537,66.274 326.537,58.516 336.032,49.022 340.226,49.022 U2.28
  Bottom w0.15: J11.4 319.358,90.699 319.358,224.173 319.151,224.38 319.151,226.488 J10.1
PIN_CROCO_2: J11.5 J12.1 R13.2 U2.27 | length 252.2
  Top w0.15: R13.2 306.508,49.089 306.508,59.697 306.746,59.935 306.746,71.25 307.062,71.566 307.062,74.973 310.799,78.71 310.799,79.6 J11.5 310.896,79.375 323.997,66.274 323.997,58.516 334.976,47.538 339.17,47.538 U2.27
  Bottom w0.15: J12.1 306.671,217.164 306.671,83.922 J11.5
PIN_CROCO_3: J11.6 J12.2 R14.2 U2.26 | length 262.9
  Top w0.15: R14.2 306.785,38.366 306.785,59.582 307.023,59.82 307.023,71.136 307.339,71.451 307.339,73.6 J11.6 315.745,72.308 315.745,71.097 321.657,65.184 321.657,58.316 334.16,45.813 338.355,45.813 U2.26
  Bottom w0.15: J12.2 297.698,223.637 297.698,209.567 295.073,206.942 295.073,193.21 306.394,181.889 306.394,81.659 J11.6
PIN_CROCO_4: J10.3 J11.2 R11.2 U2.6 | length 201.6
  Top w0.15: R11.2 309.452,85.033 309.452,85.375 310.298,86.221 310.64,86.221 310.749,86.33 310.749,87.17 J11.2 311.143,87.07 311.883,87.07 311.958,86.995 314.068,86.995 341.777,59.286 341.777,58.516 342.663,57.631 343.635,57.631 344.697,58.693 345.579,58.693 U2.6
  Bottom w0.15: J11.2 313.003,89.424 313.003,182.301 311.521,183.783 311.521,218.491 314.071,221.041 J10.3
PIN_CROCO_5: J10.4 J11.1 R12.2 U2.7 | length 189.7
  Top w0.15: R12.2 J11.1 311.218,89.535 312.413,89.535 U2.7
  Bottom w0.15: J11.1 310.896,225.893 J10.4
PIN_CROCO_18: J11.8 J12.4 R16.2 U2.18 | length 249.9
  Top w0.15: R16.2 303.276,22.386 310.896,30.006 310.896,52.952 ; J11.8 310.896,52.952 ; U2.18 310.896,52.952
  Bottom w0.15: J12.4 289.767,226.256 289.269,225.758 289.269,198.231 305.84,181.66 305.84,77.133 J11.8
PIN_CROCO_19: J11.7 J12.3 R15.2 U2.19 | length 262.1
  Top w0.15: R15.2 307.062,27.643 307.062,49.251 307.3,49.489 307.3,71.021 J11.7 315.722,69.791 315.722,68.579 320.671,63.63 320.671,45.717 U2.19
  Bottom w0.15: J12.3 290.138,224.439 290.138,197.754 306.117,181.775 306.117,79.396 J11.7
PIN_PI_10: J29.19 Q5.2 R25.2 | length 157.3
  Top w0.15: Q5.2 99.614,187.555 R25.2
  Bottom w0.15: R25.2 120.95,166.219 143.624,166.219 145.553,168.148 175.63,168.148 179.167,164.611 221.679,164.611 J29.19
PIN_PI_12: J29.32 Q2.2 R20.2 | length 98.1
  Top w0.15: J29.32 224.037,147.373 224.037,148.914 265.946,190.823 293.217,190.823 293.656,191.262 R20.2 293.918,191.303 Q2.2
PIN_PI_13: J22.3 J29.33 R26.1 | length 139.4
  Top w0.15: J22.3 118.825,227.088 119.575,227.838 125.64,227.838 133.39,220.088 133.39,214.958 138.317,210.031 R26.1 159.258,209.931 219.784,149.405 219.784,148.726 J29.33
PIN_PI_17: J28.3 J29.11 | length 34.5
  Bottom w0.15: J29.11 247.987,147.464 246.897,146.374 246.897,145.472 247.174,145.195 247.174,142.002 J28.3@266.621,122.555
PIN_PI_18: J29.12 Q3.2 R21.2 | length 93.9
  Top w0.15: J29.12 249.437,147.373 249.437,148.914 286.705,186.182 310.221,186.182 R21.2 Q3.2
PIN_PI_21: J29.40 Q4.2 R24.2 | length 119.5
  Top w0.15: Q4.2 115.31,188.511 115.698,188.124 115.698,186.418 115.31,186.031 R24.2 115.31,181.542 150.929,145.923 J29.40
PIN_PI_22: J25.3 J29.15 | length 34.7
  Bottom w0.15: J25.3@221.621,122.553 241.457,142.389 241.457,147.013 J29.15
PIN_PI_23: J26.3 J29.16 | length 26.2
  Bottom w0.152: J26.3@236.621,122.555 237.091,123.025 237.462,123.025 242.907,128.47 J29.16
PIN_PI_24: J24.3 J29.18 | length 43.4
  Bottom w0.152: J24.3@206.621,122.555 214.649,122.555 226.336,134.242 228.686,134.242 J29.18
PIN_PI_26: J29.37 Q1.1 R28.2 | length 106.9
  Top w0.15: Q1.1 130.34,186.017 130.34,183.223 R28.2 131.064,174.551 156.544,149.071 211.494,149.071 211.976,149.553 212.878,149.553 213.36,149.071 214.359,149.071 J29.37
PIN_PI_27: J27.3 J29.13 | length 29.3
  Bottom w0.15: J29.13 246.897,147.013 246.897,146.766 246.62,146.489 246.62,145.357 246.897,145.08 246.897,127.279 251.303,122.873 J27.3@252.333,122.873
PIN_POT_0: C5.1 J13.2 J16.1 U3.12 | length 99.5
  Top w0.15: J13.2 298.755,231.256 352.055,231.256 J16.1 349.443,220.03 343.76,220.03 340.788,217.058 C5.1 338.884,216.838 338.884,215.886 U3.12
PIN_POT_1: C6.1 J14.2 J16.2 U3.11 | length 74.5
  Top w0.15: J14.2 318.079,232.593 318.801,232.593 319.861,231.533 354.318,231.533 J16.2 349.533,217.58 346.42,217.58 C6.1 346.17,211.14 U3.11
PIN_POT_2: C7.1 J15.2 J16.3 U3.7 | length 55.6
  Top w0.15: J15.2 333.502,235.888 333.971,235.419 333.971,235.28 337.441,231.81 356.581,231.81 J16.3 361.442,225.815 353.282,217.655 C7.1 353.282,214.188 U3.7
PIN_SW_0: J3.1 J4.1 R4.1 U1.29 | length 121.4
  Top w0.15: J3.1 21.25,207.599 21.25,152.76 R4.1 21.529,143.51 28.151,136.888 34.181,136.888 J4.1 34.043,122.562 U1.29
PIN_SW_1: J4.2 J5.1 R5.1 U1.28 | length 128.2
  Top w0.15: J5.1 22.55,225.044 24.04,223.554 24.04,144.55 R5.1 30.099,143.51 J4.2 36.583,122.562 U1.28
PIN_SW_2: J4.3 J6.1 R6.1 U1.27 | length 104.2
  Top w0.15: U1.27 39.123,122.562 J4.3 46.355,131.155 R6.1 41.25,150.76 41.25,207.751 J6.1
PIN_SW_3: J4.4 J7.1 R7.1 U1.26 | length 116.4
  Top w0.15: J7.1 43.368,222.803 43.368,145.142 R7.1 45,133.689 J4.4 41.663,122.562 U1.26
PIN_SW_4: J4.5 J8.1 R8.1 U1.6 | length 123
  Top w0.15: U1.6 50.453,98.071 50.453,114.966 51.435,115.948 J4.5 56,134.359 R8.1 61.25,148.76 61.25,207.69 J8.1
PIN_SW_5: J4.6 J9.1 R9.1 U1.7 | length 144.7
  Top w0.15: U1.7 52.993,98.071 52.993,114.966 53.975,115.948 J4.6 54.238,130.057 54.238,130.748 R9.1 64.368,146.142 64.368,222.96 62.174,225.154 J9.1
PIN_SW_18: J1.1 J4.8 R1.1 U1.18 | length 138.4
  Top w0.15: U1.18 61.983,126.866 J4.8 67.204,129.794 80.92,143.51 R1.1 85.018,147.492 85.018,221.737 81.087,225.668 J1.1
PIN_SW_19: J2.1 J4.7 R2.1 U1.19 | length 110.3
  Top w0.15: U1.19 59.443,126.866 J4.7 70.231,143.51 R2.1 81.25,146.76 81.25,207.359 80.843,207.766 J2.1
Reset_Croco: J29.36 R10.1 U2.4 | length 177
  Top w0.15: J29.36 217.507,142.967 225.981,134.493 R10.1 322.555,96.926 322.765,96.926 350.767,68.923 U2.4
Reset_Pot: J29.35 R19.1 U3.4 | length 192.4
  Top w0.15: J29.35 218.554,148.463 218.957,148.06 218.957,148.012 219.776,147.193 220.318,147.193 221.227,146.284 221.227,145.742 222.136,144.833 222.184,144.833 223.47,143.547 282.589,143.547 291.643,134.493 R19.1 312.293,151.511 320.01,151.511 354.357,185.858 354.357,186.627 365.887,198.157 U3.4
Reset_Switch: J29.38 R3.1 U1.4 | length 299.5
  Top w0.15: U1.4 43.06,87.884 156.928,87.884 J29.38 216.271,147.227 218.213,147.227 218.844,146.596 218.844,145.193 227.004,137.033 285.9,137.033 290.318,132.615 298.313,132.615 300.191,134.493 R3.1
SCL: J19.4 J29.05 R23.2 U1.9 U2.9 U3.9 | length 517.1
  Top w0.15: R23.2 248.563,95.02 279.281,95.02 296.484,77.817 303.707,77.817 309.729,83.839 309.729,85.26 310.413,85.944 311.379,85.944 324.591,72.732 324.591,72.277 U2.9 ; J29.05 284.206,177.062 338.063,177.062 342.074,181.074 344.777,181.074 349.223,185.52 349.223,185.804 349.277,185.858 349.277,190.538 352.071,193.332 352.071,208.061 353.187,209.177 U3.9
  Bottom w0.15: U1.9 53.347,93.345 204.737,93.345 205.372,93.98 R23.2 251.632,98.089 256.077,98.089 256.54,98.552 256.54,103.624 270.002,117.086 270.002,132.527 257.057,145.472 257.057,147.013 J29.05
SDA: J19.3 J29.03 R22.1 U1.8 U2.8 U3.8 | length 512.9
  Top w0.15: J29.03 258.147,150.611 263.492,155.956 321.056,155.956 350.273,185.173 351.132,185.173 351.817,185.858 351.817,186.717 352.017,186.917 352.017,188.798 354.611,191.392 354.611,208.026 355.727,209.142 U3.8
  Bottom w0.15: U1.8 51.188,89.916 262.509,89.916 266.521,93.928 266.573,93.98 ; J29.03 259.597,147.013 259.597,145.472 272.542,132.527 272.542,117.086 259.154,103.698 J19.3@259.154,103.124 ; J19.3 259.154,103.05 259.154,101.399 266.573,93.98 ; U2.8 340.503,58.906 339.617,58.906 327.613,70.91 303.809,70.91 280.739,93.98 273.789,93.98 R22.1 266.677,93.876 266.625,93.928 266.573,93.98
VUSB: C1.1 C2.1 C3.1 C4.1 C8.1 C9.1 C10.1 C11.1 J17.1 J18.1 J20.1 J21.1 J23.A4 J23.A9 J23.B4 J23.B9 J24.1 J25.1 J26.1 J27.1 J28.1 J29.02 J29.04 Q2.5 Q3.5 Q4.5 Q5.5 R26.2 R27.2 U1.13 U1.14 U2.13 U2.14 U3.13 U3.14 | length 9.5
  Bottom w0.75: v1(325.264,52.952) 325.264,56.157 325.367,56.261 ; U2.14 325.367,56.261 ; U2.13 325.367,56.261
pads on no net: J23. J23.A6 J23.A7 J23.A8 J23.B6 J23.B7 J23.B8 J29.07 J29.08 J29.10 J29.21 J29.22 J29.23 J29.24 J29.26 J29.27 J29.28 J29.29 J29.31 MTH1.1 MTH2.1 MTH3.1 MTH4.1 MTH5.1 MTH6.1 MTH7.1 MTH8.1 U1.2 U1.3 U1.11 U1.12 U1.21 U1.22 U1.24 U2.2 U2.3 U2.11 U2.12 U2.21 U2.22 U2.24 U3.2 U3.3 U3.6 U3.18 U3.19 U3.21 U3.22 U3.24 U3.26 U3.27 U3.28 U3.29

## Polygon pours and split planes (outlines as drawn)
VUSB on Top "NONET_L-01_P-001" (solid, pour order 0): -1.978,249.901 -1.978,0.254 389.944,0.254 389.944,249.301 386.443,252.802
GND on Bottom "NONET_L-01_P-001" (solid, pour order 5): 0.127,260.604 0.127,-2.286 384.81,-2.286 394.208,7.112 393.827,7.493 393.827,259.334
GND on Bottom "NONET_L-01_P-001" (solid, pour order 2): 249.273,147.209 249.305,147.177 251.667,147.177 251.667,151.591 251.714,151.638 249.301,151.638
3V3 on Bottom "NONET_L-01_P-001" (solid, remove dead copper, pour order 4): 204.343,121.666 265.251,121.666 275.082,121.666 275.082,138.092 261.049,150.611 258.996,150.611 238.941,150.611 238.941,134.725 204.343,134.725

## Silkscreen, mask and mechanical layers (free items; w line width, h text height)
Top Overlay:
  lines w0.254: 86.106,232.41 110.363,232.41 ; 95.885,162.941 98.933,162.941 121.412,162.941 ; 148.336,162.941 121.412,162.941 ; 148.336,232.41 110.363,232.41 ; 271.526,220.851 271.526,220.472 ; 282.448,220.472 271.526,220.472 ; 284.226,232.537 284.353,232.537 284.353,248.666 342.9,248.666 342.9,232.537 340.233,232.537 ; 327.787,172.72 327.787,161.671 381.762,161.671 ; 327.787,220.472 340.233,220.472 340.233,232.537 ; 342.9,239.395 367.792,239.395 382.651,224.536 382.651,161.671 381.762,161.671 ; 381.127,161.671 381.762,161.671 ; 110.363,232.41 110.363,198.501 121.412,198.501 121.412,162.941 ; 271.526,220.472 271.526,232.537 340.233,232.537 ; 5.842,126.619 5.842,221.996 16.244,232.398 86.106,232.398 86.106,162.941 97.536,162.941 97.536,135.89 89.154,135.89 89.154,85.598 22.86,85.598 22.86,89.027 22.86,126.619 5.842,126.619 ; 68.453,99.382 69.977,99.382 69.977,106.621 68.453,106.621 68.453,99.382 ; 148.336,129.159 179.451,129.159 179.451,248.158 148.336,248.158 148.336,129.159 ; 157.162,167.73 162.433,167.73 162.433,248.158 157.162,248.158 157.162,167.73 ; 193.802,115.824 271.272,115.824 271.272,134.493 193.802,134.493 193.802,115.824 ; 211.709,6.731 219.456,6.731 219.456,12.128 211.709,12.128 211.709,6.731 ; 220.091,6.731 227.838,6.731 227.838,12.128 220.091,12.128 220.091,6.731 ; 275.717,121.412 315.341,121.412 315.341,159.385 275.717,159.385 275.717,121.412 ; 278.511,172.72 328.93,172.72 328.93,220.472 278.511,220.472 278.511,172.72 ; 284.353,6.096 284.353,96.647 284.353,97.917 377.317,97.917 377.349,97.885 377.412,97.822 377.444,97.79 377.444,30.607 352.933,6.096 284.353,6.096 ; 320.04,43.561 321.564,43.561 321.564,50.8 320.04,50.8 320.04,43.561 ; 335.123,194.183 336.647,194.183 336.647,201.422 335.123,201.422 335.123,194.183
  lines w0.5: 211.074,75.438 255.778,75.438 255.778,6.096 211.074,6.096 211.074,75.438 ; 211.074,75.438 99.822,75.438 99.822,5.969 211.074,5.969 211.074,75.438 ; 184.289,178.181 184.289,235.204 269.621,235.204 269.621,178.181 184.289,178.181 ; 204.343,143.764 204.343,158.369 269.013,158.369 269.013,143.764 204.343,143.764
  text "POT 1" at 289.511,243.545 h2
  text "POT 2" at 310.67,243.545 h2
  text "POT 3" at 329.309,243.545 h2
  text "GND / Signal / VUSB" at 286.645,240.581 h1.5
  text "GND / Signal / VUSB" at 308.554,240.581 h1.5
  text "GND / Signal / VUSB" at 326.822,240.581 h1.5
  text "BORNE TEST POT" at 350.475,231.828 h2
  text "POT 1 / POT 2 / POT 3" at 352.038,229.024 h1.5
  text "BANANE ->" at 272.7,225.13 h2
  text "<- BANANE" at 323.119,225.13 h2
  text "8/7/6/5" at 290.576,221.83 h2
  text "4/3/2/1" at 312.301,221.83 h2
  text "SW 1" at 17.426,218.975 h2
  text "SW 3" at 36.923,218.975 h2
  text "SW 5" at 56.857,218.721 h2
  text "SW 7" at 76.054,218.721 h2
  text "DEL ADRESSABLE 1" at 89.97,218.145 h2
  text "BOUTON LUMINEUX" at 111.366,218.145 h2
  text "GND / Signal / VUSB" at 92.293,215.562 h1.5
  text "GND/BTN/Signal/ALIM" at 112.75,215.435 h1.5
  text "DEL ADRESSABLE 3" at 284.709,206.969 h2
  text "DEL ADRESSABLE 4" at 306.439,206.969 h2
  text "GND / Signal / VUSB" at 287.192,204.005 h1.5
  text "GND / Signal / VUSB" at 308.534,204.005 h1.5
  text "SW 2" at 17.426,201.703 h2
  text "SW 4" at 36.923,201.703 h2
  text "SW 6" at 56.859,201.703 h2
  text "SW 8" at 75.77,201.703 h2
  text "DEL ADRESSABLE 2" at 90.74,200.111 h2
  text "GND / Signal / VUSB" at 93.349,197.274 h1.5
  text "JLCJLCJLCJLC" at 230.274,182.903 h0.8
  text "Chemin du fils USB" at 162.047,172.085 h3 r90
  text "Raspberry PI" at 208.356,171.085 h5
  text "SECTION POT" at 333.858,166.477 h4
  text "Le branchement des interrupteurs (SW) sur les connecteurs est interchangeable car les interrupteurs sont des contacts simples / Mais pour standardiser, le GND est à gauche et le signal est à droite" at 18.269,166.24 h4
  text "Banane" at 279.216,151.262 h3
  text "POT" at 291.681,151.262 h3
  text "SW" at 302.622,151.262 h3
  text "Connecteur Raspberry PI 4" at 208.236,137.557 h5
  text "BORNE TEST SW" at 41.611,134.419 h2
  text "1/2/3/4/5/6/7/8" at 43.68,132.021 h2
  text "Pull-up de reset" at 284.531,126.751 h3
  text "VUSB /  / 3V3 /  / GPIO 23 /  / GND" at 225.188,119.525 h2
  text "VUSB /  / 3V3 /  / GPIO 27 /  / GND" at 241.176,119.525 h2
  text "VUSB /  / 3V3 /  / GPIO 17 /  / GND" at 255.541,119.525 h2
  text "VUSB /  / 3V3 /  / GPIO 14 /  / GND" at 195.161,119.477 h2
  text "VUSB /  / 3V3 /  / GPIO 22 /  / GND" at 210.528,119.477 h2
  text "BORNE TEST I2C" at 251.542,109.781 h2
  text "SCL/SDA/GND/3V3" at 253.789,106.207 h1.5
  text "SECTION BANANE" at 338.074,87.122 h4
  text "1/2/3/4/5/6/7/8" at 313.126,86.995 h2 r270
  text "<- BORNE TEST BANANE" at 317.983,79.144 h2
  text "SECTION INTERRUPTEURS (SW)" at 6.365,73.919 h4
  text ".Projet_Titre" at 213.333,66.87 h3.5
  text "Titre :" at 210.82,66.602 h3
  text "Cours : .Projet_nom_du_cours" at 212.09,58.293 h3
  text "Date :" at 212.598,50.069 h3
  text ".Projet_Date" at 220.98,50.038 h3
  text "&" at 150.876,35.687 h13
  text "Conçu par :" at 211.201,34.671 h3
  text ".Projet_Concepteur1" at 222.631,30.607 h3
  text "Alexis Létourneau" at 220.98,27.051 h3
  text ".Projet_Concepteur3" at 234.95,15.24 h2
  text ".Projet_Concepteur4" at 234.95,12.954 h2
  text "SERIAL #" at 212.598,10.925 h1.52
  text "PCB REV #" at 220.345,10.925 h1.52
  text ".Projet_PCB_Rev" at 223.266,7.239 h5
Board Outline:
  the board outline again, w0.025

## Text inside footprints (layer, text, board x,y; h text height)
C1: Top Overlay "+" at 374.396,174.01 h2 r180
C2: Top Overlay "+" at 342.717,25.42 h2 r180
C3: Top Overlay "+" at 75.204,122.075 h2 r90
C4: Top Overlay "+" at 170.05,166.411 h2 r90
C5: Top Overlay "+" at 338.364,218.308 h2
C6: Top Overlay "+" at 345.87,218.58 h2
C7: Top Overlay "+" at 352.982,218.58 h2
C8: Top Overlay "+" at 322.577,200.485 h2 r90
C9: Top Overlay "+" at 284.096,200.217 h2 r90
C10: Top Overlay "+" at 106.169,191.216 h2 r90
C11: Top Overlay "+" at 90.294,191.216 h2 r90